# Altium PCB Solar Tracker.PcbDoc
Units mm, origin at the board's own origin, x right, y up, seen from the top; angles counter-clockwise.
Board outline 64 x 61 mm, 2 copper layers (Top Layer, Bottom Layer), stack 1.621 mm thick; 56 components, 24 nets, 190 pads, 105 vias.
Unrouted connection lines stored in the file: 1.
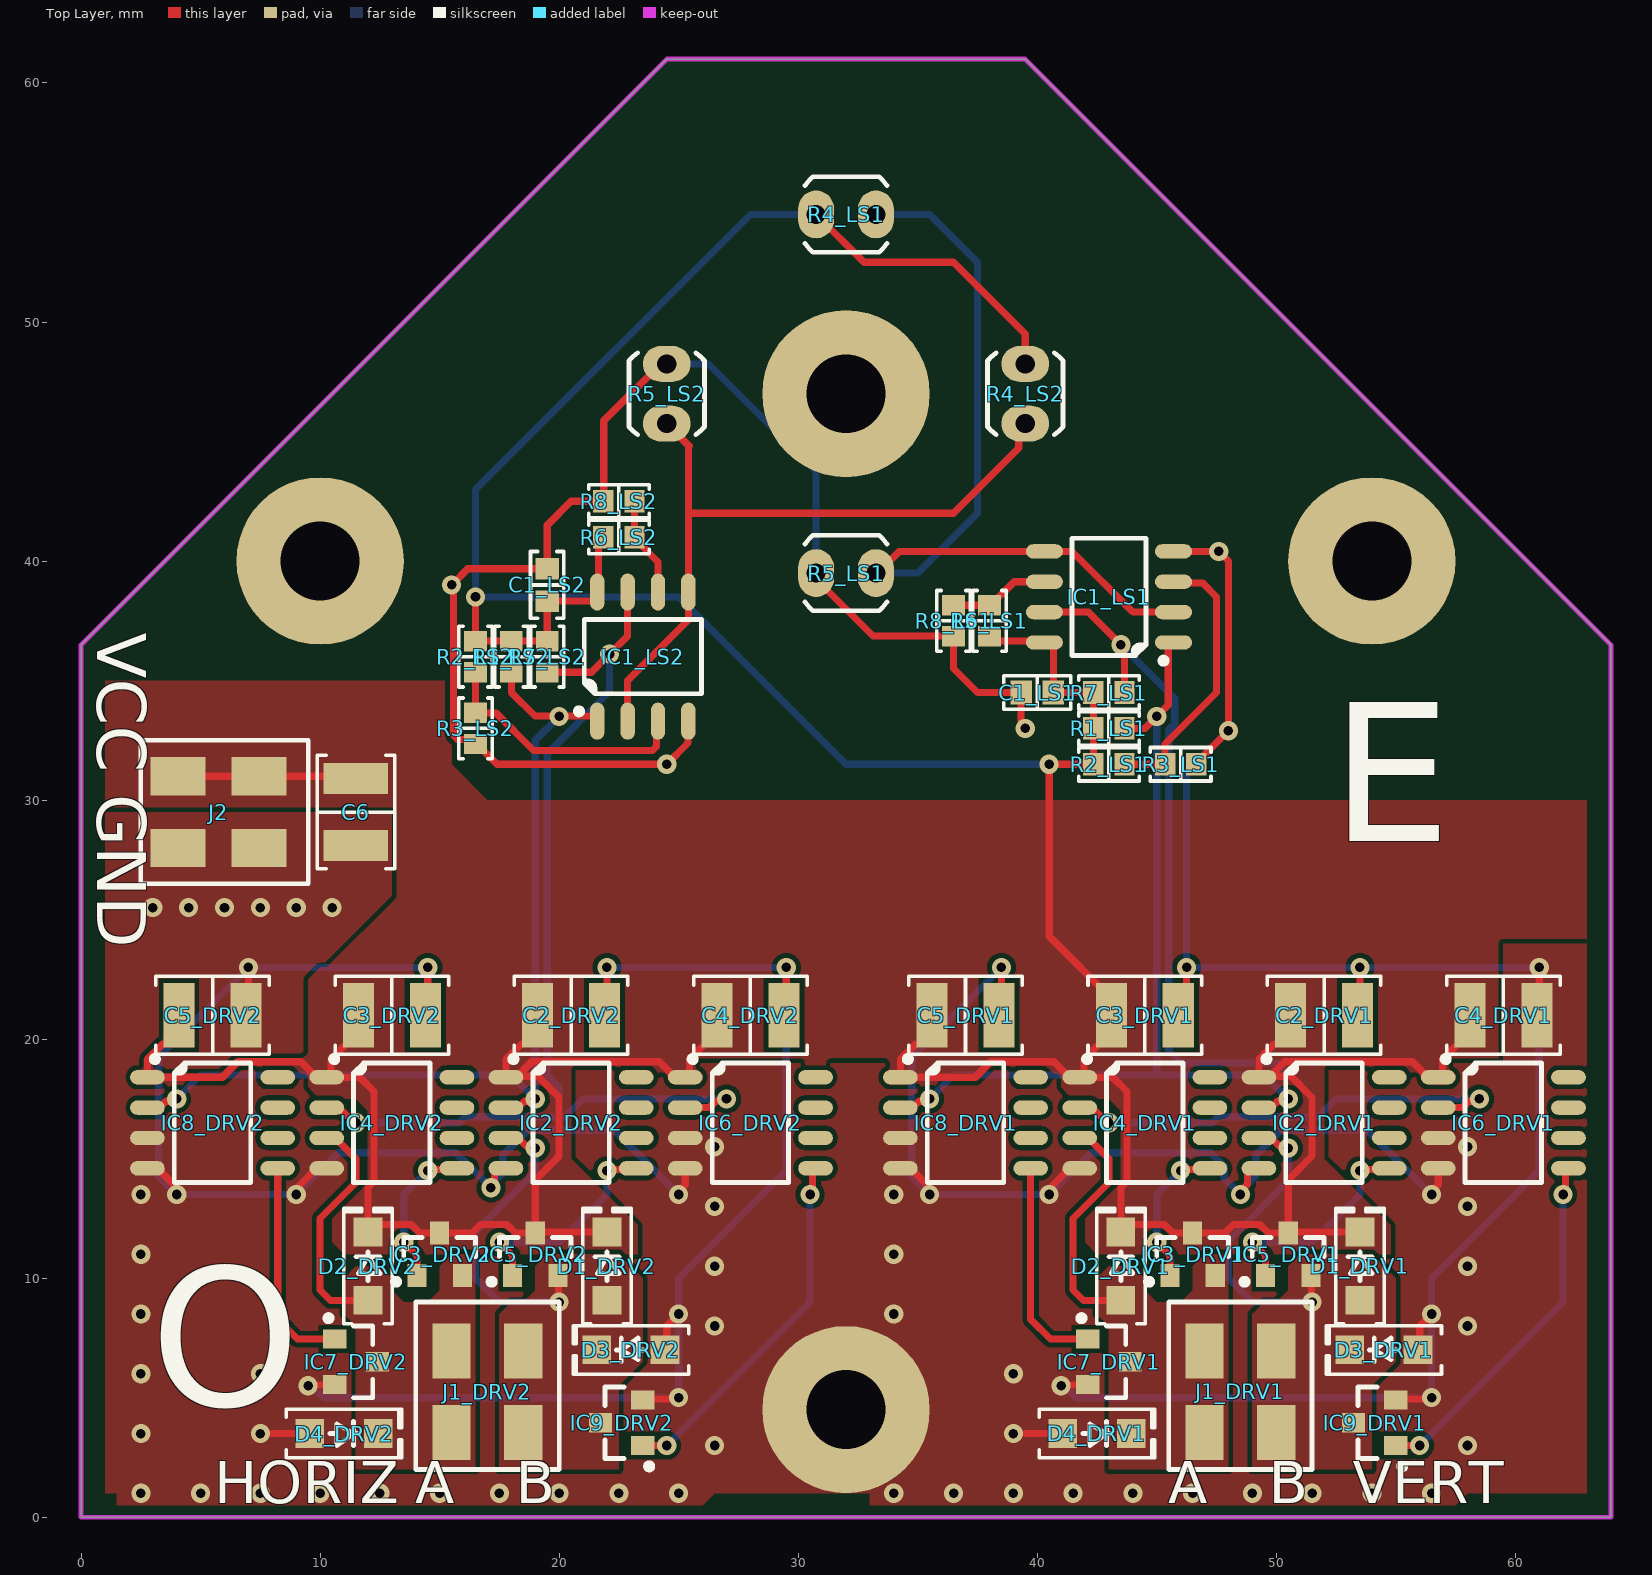
[diagram p0: Top Layer view]
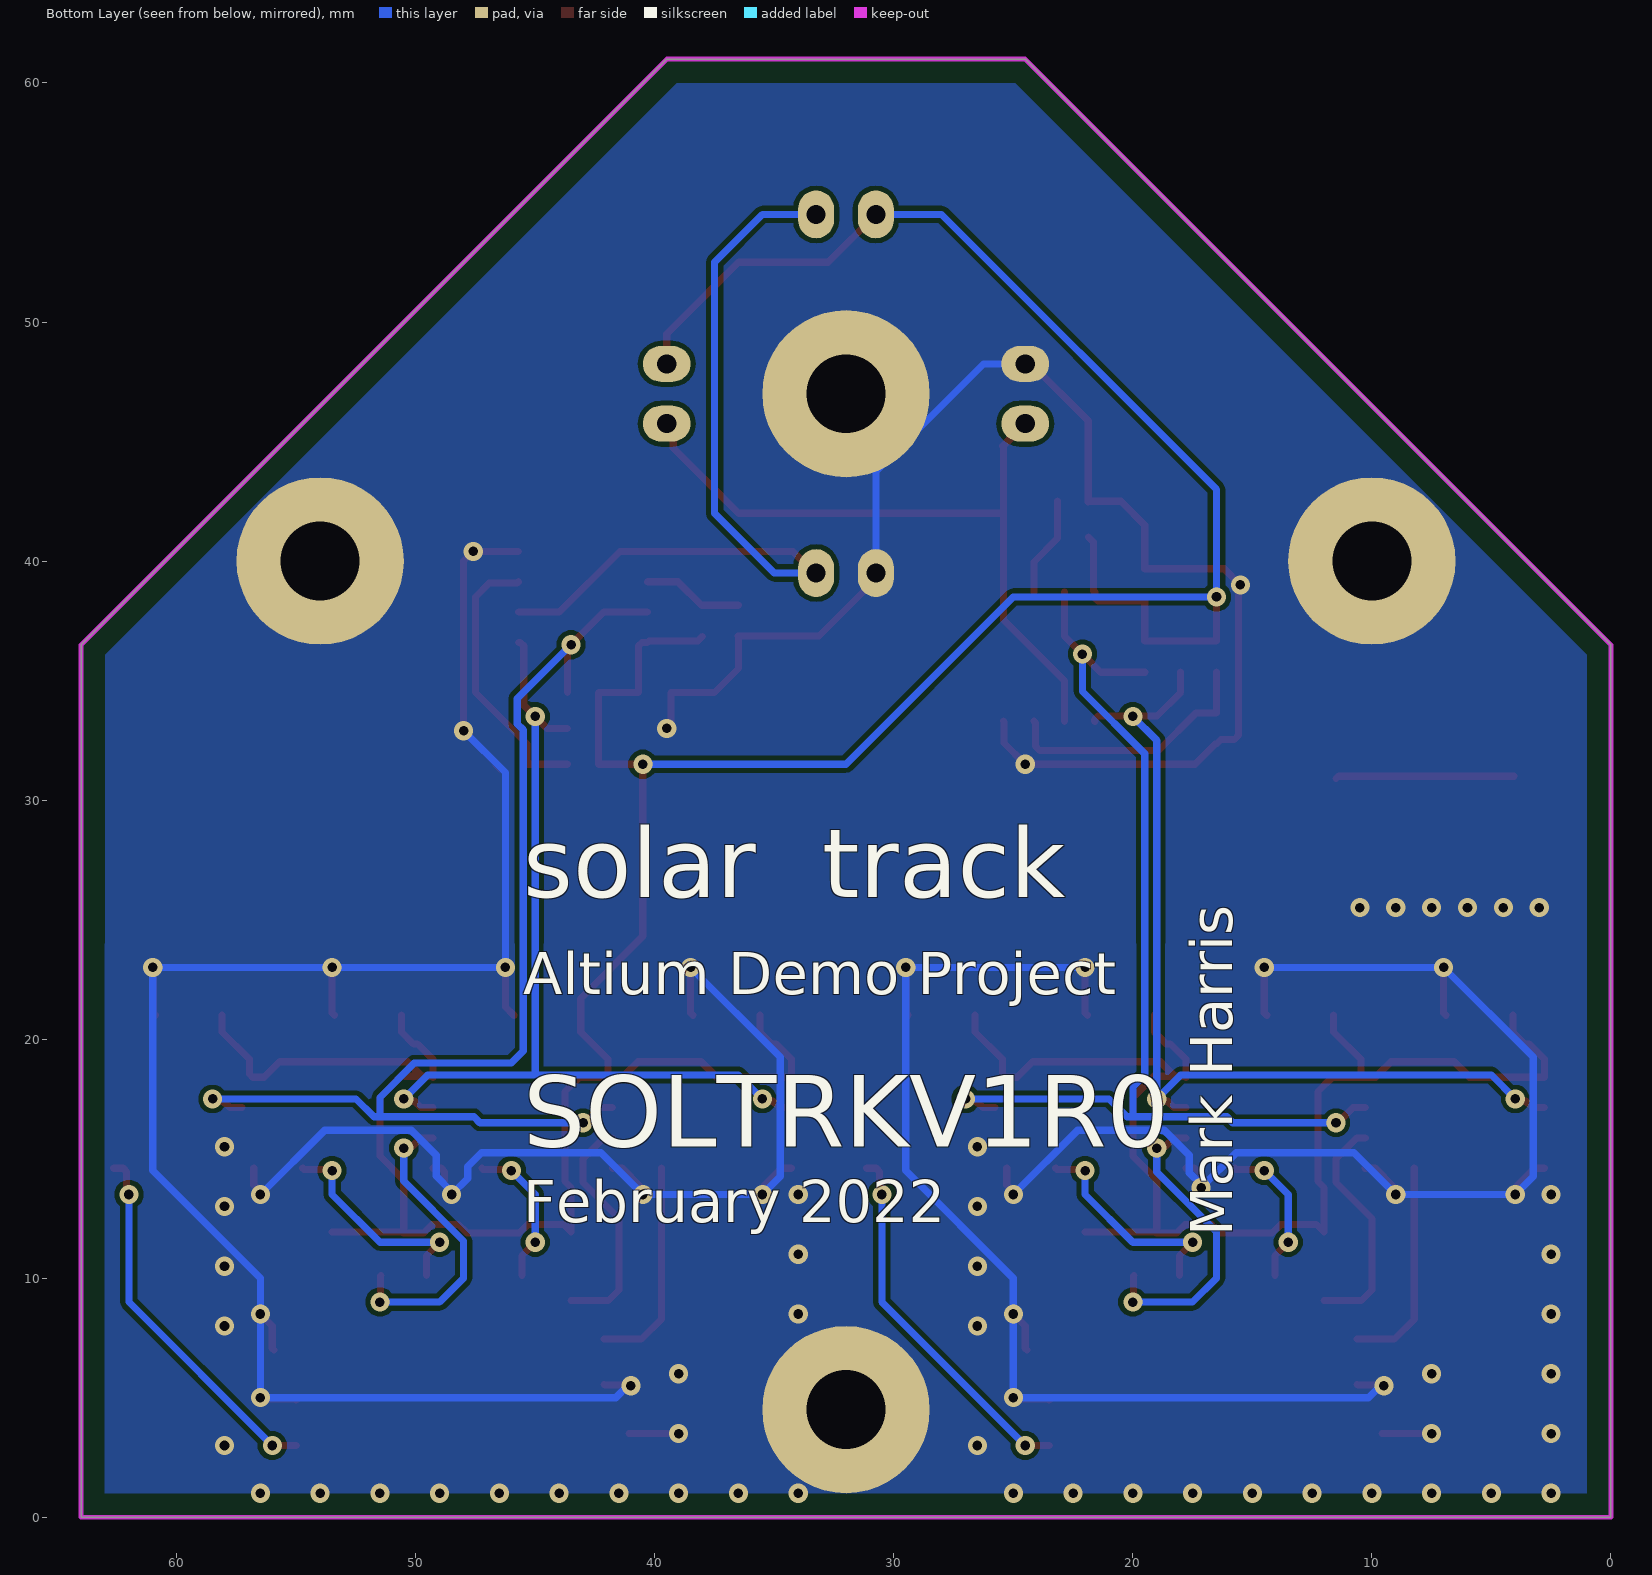
[diagram p1: Bottom Layer view, seen from below]
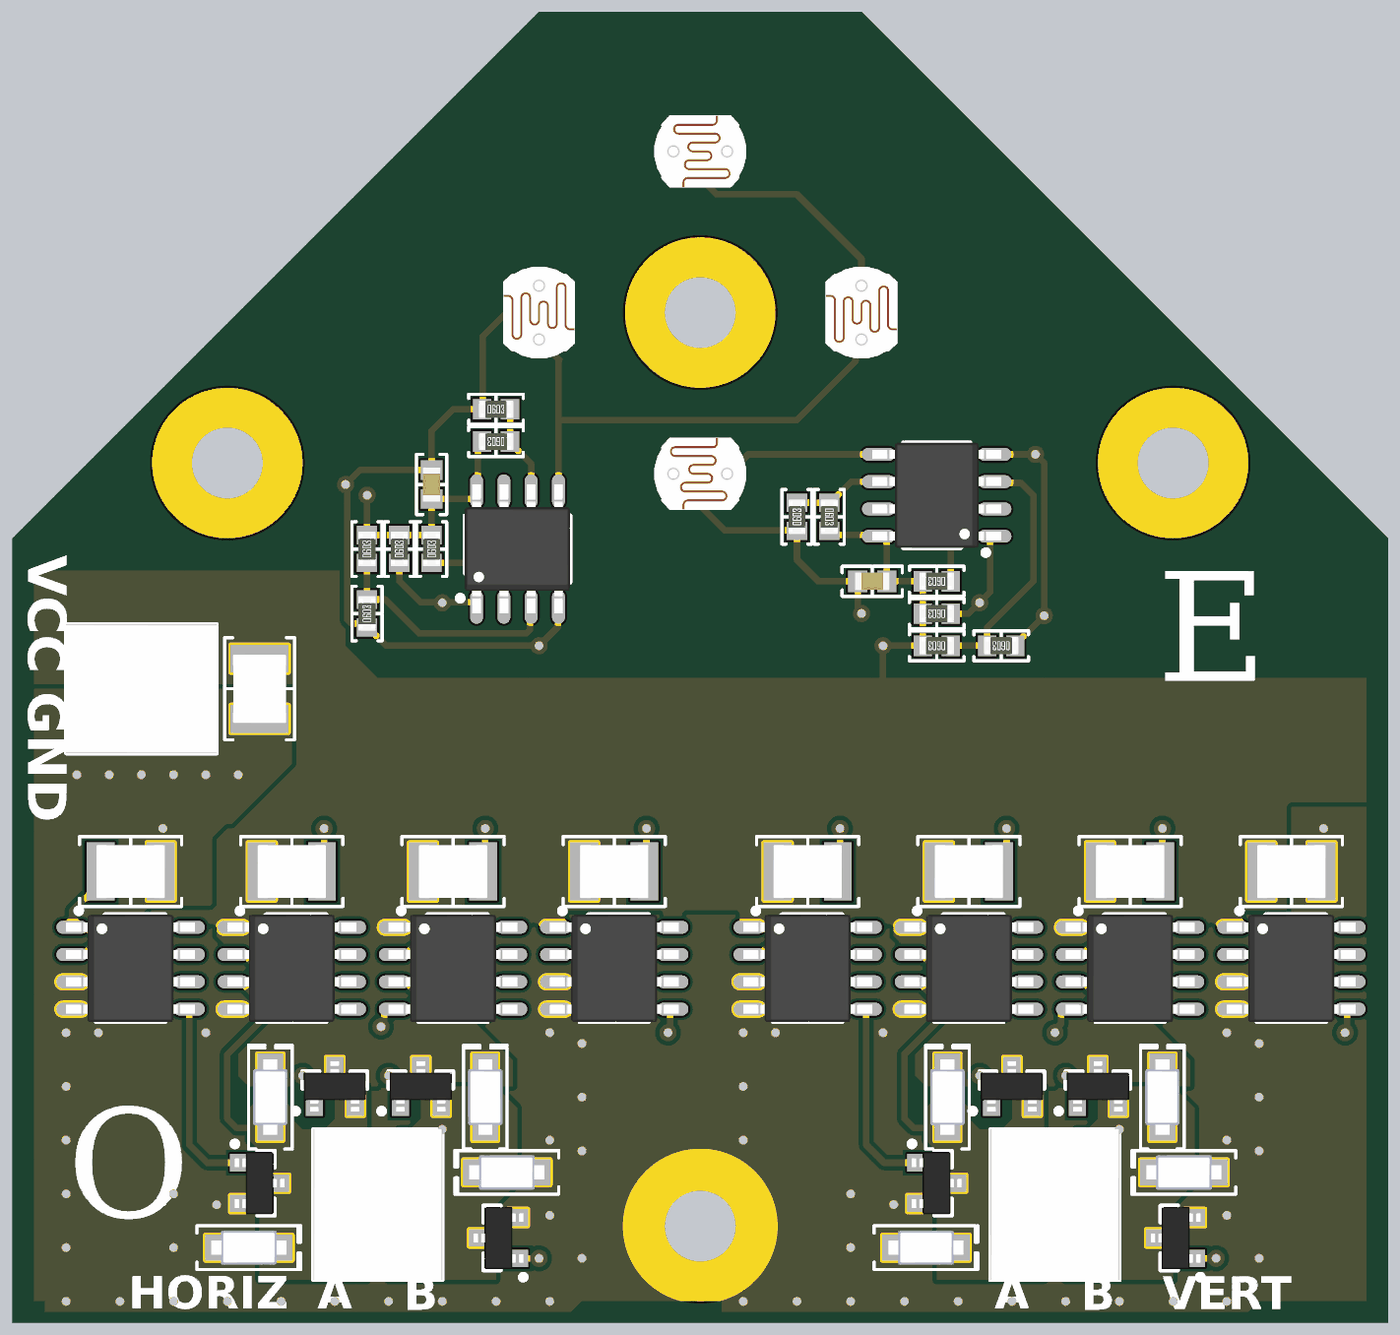
[diagram p2: 3D render of the assembled board from above, using the file's embedded part models]

## Layer stack, top to bottom
Top Solder: solder mask 0.0102, Solder Resist, Dk 3.5
Top Layer: signal copper 0.0356
Dielectric 1: dielectric 1.55, FR-4, Dk 4.8
Bottom Layer: signal copper 0.0356
Bottom Solder: solder mask 0.0102, Solder Resist, Dk 3.5

## Board outline
0,0 64,0 64,36.5 39.5,61 24.5,61 0,36.5

## Design rules (kind name [scope] priority, off if disabled: settings)
BoardOutlineClearance [All] p1: gap=1 ignorepadtopadclearanceinfootprint=FALSE
Clearance [All] p1: gap=0.2 ignorepadtopadclearanceinfootprint=FALSE
ComponentClearance ComponentClearance_1 [All vs InComponentClass('LS1') OR InComponentClass('LS2')] p1: gap=0.075 collisioncheckmode=3 verticalgap=0.2 showdistances=FALSE
ComponentClearance [All] p2: gap=0.254 collisioncheckmode=3 verticalgap=0.254 showdistances=FALSE
MinimumSolderMaskSliver [All] p1: minsoldermaskwidth=-10
PolygonConnect [All] p1: connectstyle=Direct reliefconductorwidth=0.254 reliefentries=4 polygonreliefangle="90 Angle" airgapwidth=0.254
RoomDefinition "Solar Tracker" [InComponentClass('Solar Tracker')] p1: confinementstyle=ConfineIn formatcopy=TRUE lockcomponents=FALSE outline 13.5,26 13.5,33 2,33 2,26
RoomDefinition DRV2 [InComponentClass('DRV2')] p2: confinementstyle=ConfineIn formatcopy=TRUE lockcomponents=FALSE outline 1,0 32.5,0 32.5,26 1,26
RoomDefinition LS2 [InComponentClass('LS2')] p3: confinementstyle=ConfineIn formatcopy=TRUE lockcomponents=FALSE outline 14.5,29 14.5,49.5 42,49.5 42,44 26.5,44 26.5,29
RoomDefinition LS1 [InComponentClass('LS1')] p4: confinementstyle=ConfineIn formatcopy=TRUE lockcomponents=FALSE outline 49.5,29.5 29,29.5 29,57 34.5,57 34.5,41.5 49.5,41.5
RoomDefinition DRV1 [InComponentClass('DRV1')] p5: confinementstyle=ConfineIn formatcopy=TRUE lockcomponents=FALSE outline 32.5,0 64,0 64,26 32.5,26
RoutingVias [All] p1: holewidth=0.4 width=0.8 viastyle="Through Hole" minholewidth=0.3 minwidth=0.6 maxholewidth=4 maxwidth=6
SilkToSilkClearance [All] p1: silktosilkclearance=-10
SilkToSolderMaskClearance [IsPad] p1: minsilkscreentomaskgap=-10 clearancetoexposedcopper=TRUE
SolderMaskExpansion "Via Tent" [IsVia] p1: expansion=0.102 istentingtop=TRUE
SolderMaskExpansion [All] p2: expansion=0.102 istentingtop=FALSE
Width [All] p1: maxlimit=2 minlimit=0.2 preferedwidth=0.3
26 further rules are at their usual default settings.

## Classes and differential pairs
component class "Solar Tracker": C6 J2
channel class "Motor Driver": DRV1 DRV2
channel class "Light Sensor": LS1 LS2
component class LS2: C1_LS2 IC1_LS2 R1_LS2 R2_LS2 R3_LS2 R4_LS2 R5_LS2 R6_LS2 R7_LS2 R8_LS2
component class LS1: C1_LS1 IC1_LS1 R1_LS1 R2_LS1 R3_LS1 R4_LS1 R5_LS1 R6_LS1 R7_LS1 R8_LS1
component class DRV2: C2_DRV2 C3_DRV2 C4_DRV2 C5_DRV2 D1_DRV2 D2_DRV2 D3_DRV2 D4_DRV2 IC2_DRV2 IC3_DRV2 IC4_DRV2 IC5_DRV2 IC6_DRV2 IC7_DRV2 IC8_DRV2 IC9_DRV2 J1_DRV2
component class DRV1: C2_DRV1 C3_DRV1 C4_DRV1 C5_DRV1 D1_DRV1 D2_DRV1 D3_DRV1 D4_DRV1 IC2_DRV1 IC3_DRV1 IC4_DRV1 IC5_DRV1 IC6_DRV1 IC7_DRV1 IC8_DRV1 IC9_DRV1 J1_DRV1

## Components (designator, comment, footprint, x,y, rotation, side; value= is the part's Value field where it differs from the comment)
C1_LS1 "0.1 µF" "CAP 0603_1608" 40,34.5 r0 top (schematic designator C1)
C1_LS2 "0.1 µF" "CAP 0603_1608" 19.5,39 r270 top (schematic designator C1)
C2_DRV1 "10 µF" "CAP 1210_3225 - 1MM" 52,21 r180 top (schematic designator C2)
C2_DRV2 "10 µF" "CAP 1210_3225 - 1MM" 20.5,21 r180 top (schematic designator C2)
C3_DRV1 "10 µF" "CAP 1210_3225 - 1MM" 44.5,21 r180 top (schematic designator C3)
C3_DRV2 "10 µF" "CAP 1210_3225 - 1MM" 13,21 r180 top (schematic designator C3)
C4_DRV1 "10 µF" "CAP 1210_3225 - 1MM" 59.5,21 r180 top (schematic designator C4)
C4_DRV2 "10 µF" "CAP 1210_3225 - 1MM" 28,21 r180 top (schematic designator C4)
C5_DRV1 "10 µF" "CAP 1210_3225 - 1MM" 37,21 r180 top (schematic designator C5)
C5_DRV2 "10 µF" "CAP 1210_3225 - 1MM" 5.5,21 r180 top (schematic designator C5)
C6 "10 µF" "CAP 1210_3225 - 1MM" 11.5,29.5 r90 top
D1_DRV1 "DSS15UTR" SOD123F 53.5,10.5 r90 top (schematic designator D1)
D1_DRV2 "DSS15UTR" SOD123F 22,10.5 r90 top (schematic designator D1)
D2_DRV1 "DSS15UTR" SOD123F 43.5,10.5 r90 top (schematic designator D2)
D2_DRV2 "DSS15UTR" SOD123F 12,10.5 r90 top (schematic designator D2)
D3_DRV1 "DSS15UTR" SOD123F 54.5,7 r180 top (schematic designator D3)
D3_DRV2 "DSS15UTR" SOD123F 23,7 r180 top (schematic designator D3)
D4_DRV1 "DSS15UTR" SOD123F 42.5,3.5 r0 top (schematic designator D4)
D4_DRV2 "DSS15UTR" SOD123F 11,3.5 r0 top (schematic designator D4)
IC1_LS1 "MCP6547T-I/SN" "MICROCHIP SOIC-8 SN" 43,38.5 r180 top (schematic designator IC1)
IC1_LS2 "MCP6547T-I/SN" "MICROCHIP SOIC-8 SN" 23.5,36 r90 top (schematic designator IC1)
IC2_DRV1 "MIC5015YM" "MICROCHIP MICREL SOP-8 M" 52,16.5 r0 top (schematic designator IC2)
IC2_DRV2 "MIC5015YM" "MICROCHIP MICREL SOP-8 M" 20.5,16.5 r0 top (schematic designator IC2)
IC3_DRV1 "IRLML6246TRPBF" "INFINEON SOT-23-3" 46.5,11 r90 top (schematic designator IC3)
IC3_DRV2 "IRLML6246TRPBF" "INFINEON SOT-23-3" 15,11 r90 top (schematic designator IC3)
IC4_DRV1 "MIC5015YM" "MICROCHIP MICREL SOP-8 M" 44.5,16.5 r0 top (schematic designator IC4)
IC4_DRV2 "MIC5015YM" "MICROCHIP MICREL SOP-8 M" 13,16.5 r0 top (schematic designator IC4)
IC5_DRV1 "IRLML6246TRPBF" "INFINEON SOT-23-3" 50.5,11 r90 top (schematic designator IC5)
IC5_DRV2 "IRLML6246TRPBF" "INFINEON SOT-23-3" 19,11 r90 top (schematic designator IC5)
IC6_DRV1 "MIC5015YM" "MICROCHIP MICREL SOP-8 M" 59.5,16.5 r0 top (schematic designator IC6)
IC6_DRV2 "MIC5015YM" "MICROCHIP MICREL SOP-8 M" 28,16.5 r0 top (schematic designator IC6)
IC7_DRV1 "IRLML6246TRPBF" "INFINEON SOT-23-3" 43,6.5 r0 top (schematic designator IC7)
IC7_DRV2 "IRLML6246TRPBF" "INFINEON SOT-23-3" 11.5,6.5 r0 top (schematic designator IC7)
IC8_DRV1 "MIC5015YM" "MICROCHIP MICREL SOP-8 M" 37,16.5 r0 top (schematic designator IC8)
IC8_DRV2 "MIC5015YM" "MICROCHIP MICREL SOP-8 M" 5.5,16.5 r0 top (schematic designator IC8)
IC9_DRV1 "IRLML6246TRPBF" "INFINEON SOT-23-3" 54.115,3.95 r180 top (schematic designator IC9)
IC9_DRV2 "IRLML6246TRPBF" "INFINEON SOT-23-3" 22.615,3.95 r180 top (schematic designator IC9)
J1_DRV1 "009296002202906" "AVX 9296002202806" 48.5,5.5 r0 top (schematic designator J1)
J1_DRV2 "009296002202906" "AVX 9296002202806" 17,5.5 r0 top (schematic designator J1)
J2 "009296002202906" "AVX 9296002202806" 6,29.5 r270 top
R1_LS1 "1 kOhms" "RES 0603_1608" 43,33 r180 top (schematic designator R1)
R1_LS2 "1 kOhms" "RES 0603_1608" 18,36 r90 top (schematic designator R1)
R2_LS1 "88.7 kOhms" "RES 0603_1608" 43,31.5 r180 top (schematic designator R2)
R2_LS2 "88.7 kOhms" "RES 0603_1608" 16.5,36 r90 top (schematic designator R2)
R3_LS1 "100 kOhms" "RES 0603_1608" 46,31.5 r180 top (schematic designator R3)
R3_LS2 "100 kOhms" "RES 0603_1608" 16.5,33 r90 top (schematic designator R3)
R4_LS1 "NSL-19M51" "ADVANCED PHOTONIX NSL-19M51" 32,54.5 r180 top (schematic designator R4)
R4_LS2 "NSL-19M51" "ADVANCED PHOTONIX NSL-19M51" 39.5,47 r90 top (schematic designator R4)
R5_LS1 "NSL-19M51" "ADVANCED PHOTONIX NSL-19M51" 32,39.5 r0 top (schematic designator R5)
R5_LS2 "NSL-19M51" "ADVANCED PHOTONIX NSL-19M51" 24.5,47 r270 top (schematic designator R5)
R6_LS1 "113 kOhms" "RES 0603_1608" 38,37.5 r270 top (schematic designator R6)
R6_LS2 "113 kOhms" "RES 0603_1608" 22.5,41 r180 top (schematic designator R6)
R7_LS1 "1 kOhms" "RES 0603_1608" 43,34.5 r180 top (schematic designator R7)
R7_LS2 "1 kOhms" "RES 0603_1608" 19.5,36 r90 top (schematic designator R7)
R8_LS1 "100 kOhms" "RES 0603_1608" 36.5,37.5 r90 top (schematic designator R8)
R8_LS2 "100 kOhms" "RES 0603_1608" 22.5,42.5 r0 top (schematic designator R8)

## Footprints (in the part's own frame and the unit in brackets; to place one, negate y for a bottom-side part, rotate by r counter-clockwise, add the part's x,y. Pads: shape width x height; smd on the part's side, far side on the other; paste and mask are expansions set on the pad)
"ADVANCED PHOTONIX NSL-19M51" [mm] "4mm Photoresistor"
  oval 1.5x2 hole 0.8: 1(-1.25,0) 2(1.25,0)
  silkscreen extent -1.72,-1.58 1.72,1.58, body extent -2.15,-1.65 2.15,1.65, height 1.8
"AVX 9296002202806" [mm] "POKE-HOME: LOW PROFILE HORIZONTAL"
  rect 1.6x2.3 smd: 1(-1.5,-1.95) 1(-1.5,1.45) 2(1.5,-1.95) 2(1.5,1.45)
  silkscreen extent -3,-3.5 3,3.5, body extent -3,-3.5 3,3.5, height 2.55
"CAP 0603_1608" [mm] "Chip Capacitor, 2-Leads, Body 1.60x0.80mm, IPC Medium Density"
  rect 0.9x1 smd: 1(-0.675,0) 2(0.675,0)
  silkscreen extent -1.4,-0.7 1.4,0.7, body extent -0.8,-0.41 0.8,0.41, height 0.82
"CAP 1210_3225 - 1MM" [mm] "Chip Capacitor, 2-Leads, Body 3.20x2.50mm, IPC Medium Density"
  rect 1.3x2.7 smd: 1(-1.4,0) 2(1.4,0)
  silkscreen extent -2.37,-1.63 2.37,1.63, body extent -1.6,-1.25 1.6,1.25, height 1
"INFINEON SOT-23-3" [mm] "SOT23, 3-Leads, Body 2.90x2.40mm, Pitch 0.95mm, IPC Medium Density"
  rect 0.972x0.802 smd: 1(-0.885,0.95) 2(-0.885,-0.95) 3(0.885,0)
  silkscreen extent -1.27,-1.5 0.7,1.95, body extent -1.16,-1.45 1.16,1.45, height 1
"MICROCHIP MICREL SOP-8 M" [mm] "SOIC, 8-Leads, Body 4.90x3.90mm, Pitch 1.27mm, IPC Medium Density"
  oval 1.45x0.6 smd: 1(-2.725,1.905) 2(-2.725,0.635) 3(-2.725,-0.635) 4(-2.725,-1.905) 5(2.725,-1.905) 6(2.725,-0.635) 7(2.725,0.635) 8(2.725,1.905)
  silkscreen extent -2.54,-2.5 1.6,2.79, body extent -3,-2.5 3,2.5, height 1.63
"MICROCHIP SOIC-8 SN" [mm] "SOIC, 8-Leads, Body 4.90x3.90mm, Pitch 1.27mm, IPC Medium Density"
  oval 1.55x0.6 smd: 1(-2.7,1.905) 2(-2.7,0.635) 3(-2.7,-0.635) 4(-2.7,-1.905) 5(2.7,-1.905) 6(2.7,-0.635) 7(2.7,0.635) 8(2.7,1.905)
  silkscreen extent -2.41,-2.45 1.55,2.79, body extent -3,-2.45 3,2.45, height 1.75
"RES 0603_1608" [mm] "Chip Resistor, 2-Leads, Body 1.60x0.80mm, IPC Medium Density"
  rect 0.85x0.95 smd: 1(-0.65,0) 2(0.65,0)
  silkscreen extent -1.27,-0.7 1.27,0.7, body extent -0.8,-0.4 0.8,0.4, height 0.45
SOD123F [mm] "SODFL, 2-Leads, Body 1.60x3.50mm, IPC Medium Density"
  rect 1.2x1.2 smd: 1(-1.43,0) 2(1.43,0)
  silkscreen extent -2.41,-1.02 2.41,1.02, body extent -1.75,-0.8 1.75,0.8, height 1.1

## Part data
C1_LS1 C1_LS2: library part C0603C104K5RAC7411, "CAP CER 0.1UF 50V X7R 0603", Device Package="0603 (1608 Metric)", manufacturer=KEMET, Operating Temperature="-55°C ~ 125°C", Supplier Part Number 1=399-7374-2-ND, Temperature Coefficient=X7R, Tolerance=±10%, Voltage - Rated=50V, Applications="Bypass, Decoupling", Capacitance="0.1 µF", componentlink1description=Datasheet, componentlink1url=https://api.kemet.com/component-edge/download/datasheet/C0603C104K5RAC7411.pdf, componentlink2description="DigiKey Link", componentlink2url=https://www.digikey.com/en/products/detail/kemet/C0603C104K5RAC7411/3317013, lastupdated="28/02/2022 16:36:23", Lifecycle Status=Active, Minimum Order=15000, Mounting Type="Surface Mount, MLCC", Package / Case="0603 (1608 Metric)", packaging=TapeAndReel, Part Number=C0603C104K5RAC7411, Part Status=Active, partid=2233, price=0.01, series="SMD Comm X7R", Size / Dimension="0.063\" L x 0.031\" W (1.60mm x 0.80mm)", Supplier 1=DigiKey, Thickness (Max)="0.035\" (0.90mm)"
C2_DRV1 C2_DRV2 C3_DRV1 C3_DRV2 C4_DRV1 C4_DRV2 C5_DRV1 C5_DRV2 C6: library part CL32A106MOJNNNE, "CAP CER 10UF 16V X5R 1210", Device Package="1210 (3225 Metric)", manufacturer="Samsung Electro-Mechanics", Operating Temperature="-55°C ~ 85°C", Supplier Part Number 1=1276-2864-1-ND, Temperature Coefficient=X5R, Tolerance=±20%, Voltage - Rated=16V, Applications="General Purpose", Capacitance="10 µF", componentlink1description=Datasheet, componentlink1url=http://www.samsungsem.com/kr/support/product-search/mlcc/CL32A106MOJNNNE.jsp, componentlink2description="DigiKey Link", componentlink2url=https://www.digikey.com/en/products/detail/samsung-electro-mechanics/CL32A106MOJNNNE/3888522, lastupdated="03/03/2022 14:36:33", Lifecycle Status=Active, Minimum Order=1, Mounting Type="Surface Mount, MLCC", Package / Case="1210 (3225 Metric)", packaging=TapeAndReel, Part Number=CL32A106MOJNNNE, Part Status=Active, partid=23713, price=0.07, series=CL, Size / Dimension="0.126\" L x 0.098\" W (3.20mm x 2.50mm)", Supplier 1=DigiKey, Thickness (Max)="0.106\" (2.70mm)"
D1_DRV1 D1_DRV2 D2_DRV1 D2_DRV2 D3_DRV1 D3_DRV2 D4_DRV1 D4_DRV2: "SCHOTTKY 50V SOD-123FL", Capacitance @ Vr, F="110pF @ 4V, 1MHz", Current - Average Rectified (Io)=1A, Current - Reverse Leakage @ Vr="100 µA @ 50 V", manufacturer="SMC Diode Solutions", Operating Temperature - Junction="-55°C ~ 150°C", Package / Case=SOD-123F, Supplier Device Package=SOD-123FL, Supplier Part Number 1=1655-1928-1-ND, Voltage - DC Reverse (Vr) (Max)="50 V", Voltage - Forward (Vf) (Max) @ If="670 mV @ 1 A", componentlink1description=Datasheet, componentlink1url=http://www.smc-diodes.com/propdf/DSS12U%20THRU%20DSS125U%20N1873%20REV.A.pdf, componentlink2description="DigiKey Link", componentlink2url=https://www.digikey.com/en/products/detail/smc-diode-solutions/DSS15UTR/8341860, Diode Type=Schottky, lastupdated="03/03/2022 14:49:54", Lifecycle Status=Active, Minimum Order=1, Mounting Type="Surface Mount", packaging=TapeAndReel, Part Number=DSS15UTR, Part Status=Active, partid=2511, price=0.03, series=-, Speed="Fast Recovery =< 500ns, > 200mA (Io)", Supplier 1=DigiKey
IC1_LS1 IC1_LS2: "IC COMP OPENDRN 1.6V DUAL 8-SOIC", Current - Input Bias (Max)="1pA @ 5.5V", Current - Output (Typ)=30mA, Current - Quiescent (Max)=1µA, manufacturer="Microchip Technology", Operating Temperature="-40°C ~ 85°C", Package / Case="8-SOIC (0.154\", 3.90mm Width)", Supplier Device Package=8-SOIC, Supplier Part Number 1=MCP6547T-I/SNCT-ND, Voltage - Input Offset (Max)="7mV @ 5.5V", Voltage - Supply, Single/Dual (±)="1.6V ~ 5.5V", CMRR, PSRR (Typ)="70dB CMRR, 80dB PSRR", componentlink1description=Datasheet, componentlink1url=http://www.microchip.com/mymicrochip/filehandler.aspx?ddocname=en020853, componentlink2description="DigiKey Link", componentlink2url=https://www.digikey.com/en/products/detail/microchip-technology/MCP6547T-I-SN/458458, Hysteresis=6.5mV, lastupdated="02/03/2022 20:22:27", Lifecycle Status=Active, Minimum Order=1, Mounting Type="Surface Mount", Number of Elements=2, Output Type="CMOS, Open-Drain, Rail-to-Rail, TTL", packaging=TapeAndReel, Part Number=MCP6547T-I/SN, Part Status=Active, price=0.53, Propagation Delay (Max)=8µs, series=-, Supplier 1=DigiKey, Type="General Purpose"
IC2_DRV1 IC2_DRV2 IC4_DRV1 IC4_DRV2 IC6_DRV1 IC6_DRV2 IC8_DRV1 IC8_DRV2: "IC GATE DRVR HI/LOW SIDE 8SOIC", Logic Voltage - VIL, VIH="0.8V, 2V", manufacturer="Microchip Technology", Operating Temperature="-40°C ~ 150°C (TJ)", Package / Case="8-SOIC (0.154\", 3.90mm Width)", Supplier Device Package=8-SOIC, Supplier Part Number 1=576-1235-ND, Voltage - Supply="2.75V ~ 30V", Channel Type=Single, componentlink1description=Datasheet, componentlink1url=http://ww1.microchip.com/downloads/en/DeviceDoc/mic5014.pdf, componentlink2description="DigiKey Link", componentlink2url=https://www.digikey.com/en/products/detail/microchip-technology/MIC5015YM/771704, Driven Configuration="High-Side or Low-Side", Gate Type="N-Channel MOSFET", Input Type=Inverting, lastupdated="03/03/2022 15:47:18", Lifecycle Status=Active, Minimum Order=1, Mounting Type="Surface Mount", Number of Drivers=1, packaging=Tube, Part Number=MIC5015YM, Part Status=Active, partid=15, price=2.00, series=-, Supplier 1=DigiKey
IC3_DRV1 IC3_DRV2 IC5_DRV1 IC5_DRV2 IC7_DRV1 IC7_DRV2 IC9_DRV1 IC9_DRV2: "MOSFET N-CH 20V 4.1A SOT-23", Current - Continuous Drain (Id) @ 25°C="4.1A (Ta)", Drain to Source Voltage (Vdss)=20V, Drive Voltage (Max Rds On,  Min Rds On)="2.5V, 4.5V", Input Capacitance (Ciss) (Max) @ Vds="290pF @ 16V", manufacturer="Infineon Technologies", Operating Temperature="-55°C ~ 150°C (TJ)", Package / Case="TO-236-3, SC-59, SOT-23-3", Power Dissipation (Max)="1.3W (Ta)", Supplier Device Package=Micro3™/SOT-23, Supplier Part Number 1=IRLML6246TRPBFCT-ND, componentlink1description=Datasheet, componentlink1url=https://www.infineon.com/dgdl/irlml6246pbf.pdf?fileId=5546d462533600a40153566878f22621, componentlink2description="DigiKey Link", componentlink2url=http://digikey.com/product-detail/en/infineon-technologies/IRLML6246TRPBF/IRLML6246TRPBFCT-ND/2393880, FET Type=N-Channel, Gate Charge (Qg) (Max) @ Vgs="3.5nC @ 4.5V", lastupdated="02/09/2020 01:25:05", Lifecycle Status=Active, Minimum Order=1, Mounting Type="Surface Mount", packaging=TapeAndReel, Part Number=IRLML6246TRPBF, Part Status=Active, price=0.09, Rds On (Max) @ Id, Vgs="46mOhm @ 4.1A, 4.5V", series=HEXFET®, Supplier 1=DigiKey, Technology="MOSFET (Metal Oxide)", Vgs (Max)=±12V, Vgs(th) (Max) @ Id="1.1V @ 5µA"
J1_DRV1 J1_DRV2 J2: "CONN WIRE POKE-IN 2POS SMD RA", Color=White, manufacturer="AVX Corporation", Supplier Part Number 1=478-9533-1-ND, Board-Side Pitch="0.118\" (3.00mm)", Cable Pitch="0.118\" (3.00mm)", Cable Termination=Poke-In, componentlink1description=Datasheet, componentlink1url=http://datasheets.avx.com/PHLPHorizontal_00-9296.pdf, componentlink2description="DigiKey Link", componentlink2url=http://digikey.com/product-detail/en/avx-corporation/009296002202906/478-9533-1-ND/5161727, Connector Type="Individual Wires", Contact Finish=Tin, Features="Closed End", lastupdated="01/05/2020 07:29:21", Lifecycle Status=Active, Minimum Order=1, Mounting Type="Surface Mount, Right Angle", Number of Positions=2, Number of Rows=1, packaging=TapeAndReel, Part Number=009296002202906, Part Status=Active, price=0.23, series=9296, Supplier 1=DigiKey, Wire Gauge="20-26 AWG"
R1_LS1 R1_LS2 R7_LS1 R7_LS2: library part ERJ-PA3J102V, "RES SMD 1K OHM 5% 1/4W 0603", Device Package="0603 (1608 Metric)", manufacturer="Panasonic Electronic Components", Operating Temperature="-55°C ~ 155°C", Power (Watts)="0.25W, 1/4W", Ratings=AEC-Q200, Supplier Device Package=0603, Supplier Part Number 1=P1KBZCT-ND, Temperature Coefficient=±200ppm/°C, Tolerance=±5%, componentlink1description=Datasheet, componentlink1url=https://industrial.panasonic.com/cdbs/www-data/pdf/RDO0000/AOA0000C331.pdf, componentlink2description="DigiKey Link", componentlink2url=https://www.digikey.com/en/products/detail/panasonic-electronic-components/ERJ-PA3J102V/5035970, Composition="Thick Film", Features="Automotive AEC-Q200, Pulse Withstanding", Height - Seated (Max)="0.022\" (0.55mm)", lastupdated="28/02/2022 16:15:56", Lifecycle Status=Active, Minimum Order=1, Number of Terminations=2, Package / Case="0603 (1608 Metric)", packaging=TapeAndReel, Part Number=ERJ-PA3J102V, Part Status=Active, partid=17507, price=0.01, Resistance="1 kOhms", series=ERJ-PA3, Size / Dimension="0.063\" L x 0.031\" W (1.60mm x 0.80mm)", Supplier 1=DigiKey
R2_LS1 R2_LS2: library part RC0603FR-0788K7L, "RES 88.7K OHM 1% 1/10W 0603", Device Package="0603 (1608 Metric)", manufacturer=Yageo, Operating Temperature="-55°C ~ 155°C", Power (Watts)="0.1W, 1/10W", Supplier Device Package=0603, Supplier Part Number 1=311-88.7KHRCT-ND, Temperature Coefficient=±100ppm/°C, Tolerance=±1%, componentlink1description=Datasheet, componentlink1url=https://www.yageo.com/upload/media/product/productsearch/datasheet/rchip/PYu-RC_Group_51_RoHS_L_10.pdf, componentlink2description="DigiKey Link", componentlink2url=https://www.digikey.com/en/products/detail/yageo/RC0603FR-0788K7L/727415, Composition="Thick Film", Features="Moisture Resistant", Height - Seated (Max)="0.022\" (0.55mm)", lastupdated="28/02/2022 16:16:25", Lifecycle Status=Active, Minimum Order=1, Number of Terminations=2, Package / Case="0603 (1608 Metric)", packaging=CutTape, Part Number=RC0603FR-0788K7L, Part Status=Active, partid=7595, price=0.01, Resistance="88.7 kOhms", series=RC_L, Size / Dimension="0.063\" L x 0.031\" W (1.60mm x 0.80mm)", Supplier 1=DigiKey
R3_LS1 R3_LS2 R8_LS1 R8_LS2: library part ERJ-PA3F1003V, "RES SMD 100K OHM 1% 1/4W 0603", Device Package="0603 (1608 Metric)", manufacturer="Panasonic Electronic Components", Operating Temperature="-55°C ~ 155°C", Power (Watts)="0.25W, 1/4W", Ratings=AEC-Q200, Supplier Device Package=0603, Supplier Part Number 1=P100KBYCT-ND, Temperature Coefficient=±100ppm/°C, Tolerance=±1%, componentlink1description=Datasheet, componentlink1url=https://industrial.panasonic.com/cdbs/www-data/pdf/RDO0000/AOA0000C331.pdf, componentlink2description="DigiKey Link", componentlink2url=https://www.digikey.com/en/products/detail/panasonic-electronic-components/ERJ-PA3F1003V/5035850, Composition="Thick Film", Features="Automotive AEC-Q200, Pulse Withstanding", Height - Seated (Max)="0.022\" (0.55mm)", lastupdated="28/02/2022 16:16:03", Lifecycle Status=Active, Minimum Order=1, Number of Terminations=2, Package / Case="0603 (1608 Metric)", packaging=TapeAndReel, Part Number=ERJ-PA3F1003V, Part Status=Active, partid=14879, price=0.02, Resistance="100 kOhms", series=ERJ-PA3, Size / Dimension="0.063\" L x 0.031\" W (1.60mm x 0.80mm)", Supplier 1=DigiKey
R4_LS1 R4_LS2 R5_LS1 R5_LS2: "PHOTOCELL", Cell Resistance (Min) @ Dark="20 MOhms @ 10 s", Cell Resistance @ Illuminance="20 ~ 100kOhms @ 10 lux", Device Package=Radial, manufacturer="Advanced Photonix", Operating Temperature="-60°C ~ 75°C (TA)", Supplier Device Package=TO-18, Supplier Part Number 1=NSL-19M51-ND, Voltage - Max=100Vpk, componentlink1description=Datasheet, componentlink1url=https://lunainc.com/wp-content/uploads/2016/06/NSL-19M51.pdf, componentlink2description="DigiKey Link", componentlink2url=https://www.digikey.com/en/products/detail/advanced-photonix/NSL-19M51/5039794, lastupdated="03/03/2022 12:53:42", Lifecycle Status=Active, Minimum Order=1, Mounting Type="Through Hole", Package / Case=Radial, packaging=Bulk, Part Number=NSL-19M51, Part Status=Active, price=0.61, series=-, Supplier 1=DigiKey, Wavelength=550nm
R6_LS1 R6_LS2: library part RMCF0603FT113K, "RES 113K OHM 1% 1/10W 0603", Device Package="0603 (1608 Metric)", manufacturer="Stackpole Electronics Inc", Operating Temperature="-55°C ~ 155°C", Power (Watts)="0.1W, 1/10W", Ratings=AEC-Q200, Supplier Device Package=0603, Supplier Part Number 1=RMCF0603FT113KCT-ND, Temperature Coefficient=±100ppm/°C, Tolerance=±1%, componentlink1description=Datasheet, componentlink1url=https://www.seielect.com/catalog/sei-rmcf_rmcp.pdf, componentlink2description="DigiKey Link", componentlink2url=https://www.digikey.com/en/products/detail/stackpole-electronics-inc/RMCF0603FT113K/1713567, Composition="Thick Film", Features="Automotive AEC-Q200", Height - Seated (Max)="0.022\" (0.55mm)", lastupdated="28/02/2022 16:16:02", Lifecycle Status=Active, Minimum Order=1, Number of Terminations=2, Package / Case="0603 (1608 Metric)", packaging=CutTape, Part Number=RMCF0603FT113K, Part Status=Active, partid=15681, price=0.01, Resistance="113 kOhms", series=RMCF, Size / Dimension="0.061\" L x 0.031\" W (1.55mm x 0.80mm)", Supplier 1=DigiKey

## Free pads (board coordinates)
  round 7 hole 3.3: M(10,40) M1(54,40) M2(32,4.5) M3(32,47)

## Via types
v1: diameter 0.8, hole 0.4, Top Layer to Bottom Layer, tented both sides, 105 vias

## Nets (pads, with @x,y where several pads share a name; then routed paths per layer and width w, separated by ;. In a path a pad name is that pad's centre, name@x,y a point inside that pad or via, vN(x,y) a via of type N, cw(c..) or ccw(c..) an arc to the next point about the centre after c; other vN are vias at no path point)
3V3: C1_LS1.2 C1_LS2.2 C2_DRV1.2 C2_DRV2.2 C3_DRV1.2 C3_DRV2.2 C4_DRV1.2 C4_DRV2.2 C5_DRV1.2 C5_DRV2.2 C6.2 D1_DRV1.2 D1_DRV2.2 D2_DRV1.2 D2_DRV2.2 IC1_LS1.8 IC1_LS2.8 IC2_DRV1.1 IC2_DRV2.1 IC3_DRV1.3 IC3_DRV2.3 IC4_DRV1.1 IC4_DRV2.1 IC5_DRV1.3 IC5_DRV2.3 IC6_DRV1.1 IC6_DRV2.1 IC8_DRV1.1 IC8_DRV2.1 J2.1 R1_LS1.2 R1_LS2.2 R2_LS1.2 R2_LS2.2 R4_LS1.2 R4_LS2.2 R6_LS1.2 R6_LS2.2 R7_LS1.2 R7_LS2.2 | length 216.3
  Top Layer w0.3: J2.1@4.05,31 7.45,31 11.4,31 C6.2 ; C5_DRV2.2 4.1,20.3 3.6,19.8 3.42,19.8 2.775,19.155 IC8_DRV2.1 5.904,18.405 6.554,19.055 9.2,19.055 9.85,18.405 IC4_DRV2.1 IC4_DRV2.1@10.316,18.405 ; C3_DRV2.2 11.6,20.3 10.455,19.155 10.455,18.544 IC4_DRV2.1@10.316,18.405 ; v1(16.5,38.5) R2_LS2.2 R1_LS2.2 R7_LS2.2 C1_LS2.2 21.456,38.325 21.595,38.464 IC1_LS2.8 21.652,38.757 21.652,40.802 R6_LS2.2 ; C2_DRV2.2 19.1,20.3 18.6,19.8 18.42,19.8 17.775,19.155 IC2_DRV2.1 17.82,18.45 IC2_DRV2.1@18.245,18.45 ; D1_DRV2.2 19.045,11.93 IC5_DRV2.3 ; C4_DRV2.2 26.6,20.3 25.455,19.155 25.455,18.544 25.316,18.405 IC6_DRV2.1 24.85,18.405 24.2,19.055 18.85,19.055 IC2_DRV2.1@18.245,18.45 ; R4_LS1.2 32.75,52.5 36.5,52.5 39.5,49.5 R4_LS2.2 ; C5_DRV1.2 35.6,20.3 35.1,19.8 34.92,19.8 34.275,19.155 IC8_DRV1.1 37.404,18.405 38.054,19.055 40.7,19.055 41.35,18.405 IC4_DRV1.1 IC4_DRV1.1@41.816,18.405 ; R6_LS1.2 38.198,36.652 40.243,36.652 IC1_LS1.8 40.536,36.595 40.675,36.456 C1_LS1.2 R7_LS1.2 R1_LS1.2 R2_LS1.2 v1(40.5,31.5) 40.5,24.3 43.1,21.7 C3_DRV1.2 43.1,20.3 41.955,19.155 41.955,18.544 IC4_DRV1.1@41.816,18.405 ; C2_DRV1.2 50.6,20.3 50.1,19.8 49.92,19.8 49.275,19.155 IC2_DRV1.1 49.32,18.45 IC2_DRV1.1@49.745,18.45 ; D1_DRV1.2 50.545,11.93 IC5_DRV1.3 ; C4_DRV1.2 58.1,20.3 56.955,19.155 56.955,18.544 56.816,18.405 IC6_DRV1.1 56.35,18.405 55.7,19.055 50.35,19.055 IC2_DRV1.1@49.745,18.45 ; IC4_DRV2.1@10.316,18.405 11.656,18.405 12.25,17.811 12.25,14.043 12,13.793 D2_DRV2.2 12.32,12.25 13.811,12.25 14.176,11.885 IC3_DRV2.3 16.348,11.885 16.713,12.25 17.811,12.25 18.176,11.885 IC5_DRV2.3 ; IC2_DRV2.1@18.245,18.45 18.95,18.45 19,18.5 19.061,18.5 20,17.561 20,15.11 19,14.111 IC5_DRV2.3 ; IC4_DRV1.1@41.816,18.405 43.156,18.405 43.75,17.811 43.75,14.043 43.5,13.793 D2_DRV1.2 43.82,12.25 45.311,12.25 45.676,11.885 IC3_DRV1.3 47.848,11.885 48.213,12.25 49.311,12.25 49.676,11.885 IC5_DRV1.3 ; IC2_DRV1.1@49.745,18.45 50.45,18.45 50.5,18.5 50.561,18.5 51.5,17.561 51.5,15.11 50.5,14.111 IC5_DRV1.3
  Bottom Layer w0.3: R4_LS1.2@30.75,54.25 R4_LS1.2 28,54.5 16.5,43 v1(16.5,38.5) 25,38.5 32,31.5 v1(40.5,31.5)
DA_DRV1: D1_DRV1.1 D3_DRV1.2 IC2_DRV1.3 IC5_DRV1.2 IC9_DRV1.3 J1_DRV1.2 | length 12.9
  Top Layer w0.3: IC2_DRV1.3 49.781,15.865 50.11,15.537 50.404,15.537 v1(50.5,15.441) ; IC5_DRV1.2 51.475,10.09 51.475,9.025 v1(51.5,9)
  Bottom Layer w0.3: v1(50.5,15.441) 50.5,14.061 48,11.561 48,10 49,9 v1(51.5,9)
DA_DRV2: D1_DRV2.1 D3_DRV2.2 IC2_DRV2.3 IC5_DRV2.2 IC9_DRV2.3 J1_DRV2.2 | length 12.9
  Top Layer w0.3: IC2_DRV2.3 18.281,15.865 18.61,15.537 18.904,15.537 v1(19,15.441) ; IC5_DRV2.2 19.975,10.09 19.975,9.025 v1(20,9)
  Bottom Layer w0.3: v1(19,15.441) 19,14.439 16.5,11.939 16.5,10 17.5,9 v1(20,9)
DB_DRV1: D2_DRV1.1 D4_DRV1.2 IC3_DRV1.2 IC4_DRV1.3 IC7_DRV1.3 J1_DRV1.1 | length 9.9
  Top Layer w0.3: IC4_DRV1.3 42.135,15.865 43,15 43,14 41.5,12.5 41.5,9.5 41.93,9.07 D2_DRV1.1
DB_DRV2: D2_DRV2.1 D4_DRV2.2 IC3_DRV2.2 IC4_DRV2.3 IC7_DRV2.3 J1_DRV2.1 | length 9.9
  Top Layer w0.3: IC4_DRV2.3 10.635,15.865 11.5,15 11.5,14 10,12.5 10,9.5 10.43,9.07 D2_DRV2.1
FWD_DRV1: IC1_LS1.1 IC2_DRV1.2 IC8_DRV1.2 R1_LS1.1 | length 38.6
  Top Layer w0.3: IC8_DRV1.2 34.781,17.135 35.051,17.404 35.404,17.404 v1(35.5,17.5) ; R1_LS1.1 44.5,33 45.484,33.984 45.484,36.456 45.622,36.595 IC1_LS1.1 ; IC2_DRV1.2 49.781,17.135 50.051,17.404 50.404,17.404 v1(50.5,17.5)
  Bottom Layer w0.3: v1(35.5,17.5) 36.5,18.5 45,18.5 ; v1(45,33.5) 45,18.5 ; v1(50.5,17.5) 49.5,18.5 45,18.5
FWD_DRV2: IC1_LS2.1 IC2_DRV2.2 IC8_DRV2.2 R1_LS2.1 | length 40
  Top Layer w0.3: IC8_DRV2.2 3.281,17.135 3.551,17.404 3.904,17.404 v1(4,17.5) ; IC2_DRV2.2 18.281,17.135 18.551,17.404 18.904,17.404 v1(19,17.5) ; R1_LS2.1 18,34.5 18.984,33.516 21.456,33.516 21.595,33.378 IC1_LS2.1
  Bottom Layer w0.3: v1(4,17.5) 5,18.5 18,18.5 v1(19,17.5) 19,32.5 v1(20,33.5)
GHA_DRV1: IC2_DRV1.5 IC5_DRV1.1 | length 9.2
  Top Layer w0.3: v1(49,11.5) 49.55,10.95 IC5_DRV1.1 ; v1(53.5,14.5) 53.548,14.547 54.677,14.547 IC2_DRV1.5
  Bottom Layer w0.3: v1(49,11.5) 51.5,11.5 53.5,13.5 v1(53.5,14.5)
GHA_DRV2: IC2_DRV2.5 IC5_DRV2.1 | length 9.2
  Top Layer w0.3: v1(17.5,11.5) 18.05,10.95 IC5_DRV2.1 ; v1(22,14.5) 22.047,14.547 23.177,14.547 IC2_DRV2.5
  Bottom Layer w0.3: v1(17.5,11.5) 20,11.5 22,13.5 v1(22,14.5)
GHB_DRV1: IC3_DRV1.1 IC4_DRV1.5 | length 6.3
  Top Layer w0.3: v1(45,11.5) 45.55,10.95 IC3_DRV1.1 ; v1(46,14.5) 46.047,14.547 47.178,14.547 IC4_DRV1.5
  Bottom Layer w0.3: v1(45,11.5) 45,13.5 v1(46,14.5)
GHB_DRV2: IC3_DRV2.1 IC4_DRV2.5 | length 6.3
  Top Layer w0.3: v1(13.5,11.5) 14.05,10.95 IC3_DRV2.1 ; v1(14.5,14.5) 14.547,14.547 15.677,14.547 IC4_DRV2.5
  Bottom Layer w0.3: v1(13.5,11.5) 13.5,13.5 v1(14.5,14.5)
GLA_DRV1: IC6_DRV1.5 IC9_DRV1.1 | length 15.6
  Top Layer w0.3: IC9_DRV1.1 v1(56,3) ; v1(62,13.5) 62.096,13.596 62.096,14.456 62.234,14.595 IC6_DRV1.5@62.639,14.595
  Bottom Layer w0.3: v1(56,3) 62,9 v1(62,13.5)
GLA_DRV2: IC6_DRV2.5 IC9_DRV2.1 | length 15.6
  Top Layer w0.3: IC9_DRV2.1 v1(24.5,3) ; v1(30.5,13.5) 30.596,13.596 30.596,14.456 30.734,14.595 IC6_DRV2.5@31.139,14.595
  Bottom Layer w0.3: v1(24.5,3) 30.5,9 v1(30.5,13.5)
GLB_DRV1: IC7_DRV1.1 IC8_DRV1.5 | length 9.1
  Top Layer w0.3: IC8_DRV1.5 39.725,8.275 40.55,7.45 IC7_DRV1.1
GLB_DRV2: IC7_DRV2.1 IC8_DRV2.5 | length 9.1
  Top Layer w0.3: IC8_DRV2.5 8.225,8.275 9.05,7.45 IC7_DRV2.1
GND: C1_LS1.1 C1_LS2.1 C2_DRV1.1 C2_DRV2.1 C3_DRV1.1 C3_DRV2.1 C4_DRV1.1 C4_DRV2.1 C5_DRV1.1 C5_DRV2.1 C6.1 D3_DRV1.1 D3_DRV2.1 D4_DRV1.1 D4_DRV2.1 IC1_LS1.4 IC1_LS2.4 IC2_DRV1.4 IC2_DRV2.4 IC4_DRV1.4 IC4_DRV2.4 IC6_DRV1.3 IC6_DRV1.4 IC6_DRV2.3 IC6_DRV2.4 IC7_DRV1.2 IC7_DRV2.2 IC8_DRV1.3 IC8_DRV1.4 IC8_DRV2.3 IC8_DRV2.4 IC9_DRV1.2 IC9_DRV2.2 J2.2 pad.M pad.M1 pad.M2 pad.M3 R3_LS1.1 R3_LS2.1 R5_LS1.1 R5_LS2.1 R8_LS1.1 R8_LS2.1 | length 297
  Top Layer w0.3: IC8_DRV2.4 3.2,14.595 3.904,13.891 3.904,13.596 v1(4,13.5) ; C5_DRV2.1 7,21.1 v1(7,23) ; 8,3.5 D4_DRV2.1 ; v1(9,13.5) 9.096,13.596 9.096,13.841 9.85,14.595 IC4_DRV2.4 ; v1(9.5,5.5) 9.525,5.525 10.59,5.525 IC7_DRV2.2 ; C3_DRV2.1 14.5,21.1 v1(14.5,23) ; v1(17.146,13.782) 17.146,13.917 17.293,14.063 17.293,14.456 17.431,14.595 IC2_DRV2.4 ; R8_LS2.1 20.5,42.5 19.5,41.5 C1_LS2.1 16.175,39.675 15.575,39.075 15.575,32.713 15.751,32.537 16.313,32.537 R3_LS2.1 16.55,32.35 17.4,31.5 v1(24.5,31.5) 25.385,32.385 25.385,33.28 IC1_LS2.4 ; R8_LS2.1@21.868,42.482 21.868,45.868 24.25,48.25 R5_LS2.1 ; C2_DRV2.1 22,21.1 v1(22,23) ; IC9_DRV2.2 23.55,4.95 24.95,4.95 v1(25,5) ; D3_DRV2.1 24.5,7.07 24.5,8 v1(25,8.5) ; v1(25,13.5) 25,13.632 25.275,13.907 IC6_DRV2.4 ; C4_DRV2.1 29.5,21.1 v1(29.5,23) ; R5_LS1.1 30.75,39.25 33.132,36.868 R8_LS1.1@36.518,36.868 ; IC8_DRV1.4 34.7,14.595 35.404,13.891 35.404,13.596 v1(35.5,13.5) ; R8_LS1.1 36.5,35.5 37.5,34.5 C1_LS1.1 39.325,33.31 39.5,33.135 v1(39.5,33) ; C5_DRV1.1 38.5,21.1 v1(38.5,23) ; 39.5,3.5 D4_DRV1.1 ; v1(40.5,13.5) 40.596,13.596 40.596,13.841 41.35,14.595 IC4_DRV1.4 ; v1(41,5.5) 41.025,5.525 42.09,5.525 IC7_DRV1.2 ; IC1_LS1.4 v1(47.595,40.405) 48,40 v1(48,32.9) 46.65,31.55 R3_LS1.1 R3_LS1.1@46.463,31.313 ; C3_DRV1.1 46.25,21.35 v1(46.25,23) ; v1(48.5,13.5) 48.5,13.635 48.793,13.928 48.793,14.456 48.931,14.595 IC2_DRV1.4 ; C2_DRV1.1 53.5,21.1 v1(53.5,23) ; IC9_DRV1.2 55.05,4.95 56.45,4.95 v1(56.5,5) ; D3_DRV1.1 56,7.07 56,8 v1(56.5,8.5) ; v1(56.5,13.5) 56.5,13.632 56.775,13.907 IC6_DRV1.4 ; C4_DRV1.1 61,21.1 v1(61,23)
  Bottom Layer w0.3: v1(9.5,5.5) 9.635,5.5 10.135,5 v1(25,5) v1(25,8.5) 25,10 29.5,14.5 v1(29.5,23) v1(22,23) ; v1(14.5,23) v1(7,23) 3.25,19.25 3.25,14.25 v1(4,13.5) v1(9,13.5) 10.75,15.25 15.678,15.25 v1(17.146,13.782) 17.146,13.917 17.643,14.413 17.643,15.144 18.689,16.191 22.309,16.191 v1(25,13.5) ; R5_LS2.1 26.25,48.25 30.75,43.75 R5_LS1.1 ; v1(38.5,23) 34.75,19.25 34.75,14.25 v1(35.5,13.5) v1(40.5,13.5) 42.25,15.25 47.25,15.25 47.827,14.673 47.827,14.173 v1(48.5,13.5) 48.5,13.629 49.143,14.272 49.143,15.144 50.189,16.191 53.809,16.191 v1(56.5,13.5) ; v1(41,5.5) 41.135,5.5 41.635,5 v1(56.5,5) v1(56.5,8.5) 56.5,10 61,14.5 v1(61,23) v1(53.5,23) v1(46.25,23) 46.25,31.15 v1(48,32.9)
  other v1: 2.5,1 5,1 7.5,1 10,1 12.5,1 15,1 17.5,1 20,1 22.5,1 25,1 34,1 36.5,1 39,1 41.5,1 44,1 46.5,1 49,1 51.5,1 54,1 56.5,1 26.5,3 58,3 2.5,3.5 7.5,3.5 39,3.5 2.5,6 7.5,6 39,6 26.5,8 58,8 2.5,8.5 34,8.5 26.5,10.5 58,10.5 2.5,11 34,11 26.5,13 58,13 2.5,13.5 34,13.5 26.5,15.5 58,15.5 3,25.5 4.5,25.5 6,25.5 7.5,25.5 9,25.5 10.5,25.5 15.5,39
REV_DRV1: IC1_LS1.7 IC4_DRV1.2 IC6_DRV1.2 R7_LS1.1 | length 50.3
  Top Layer w0.3: IC1_LS1.7 42.135,37.865 v1(43.5,36.5) 43.65,36.35 R7_LS1.1 ; IC4_DRV1.2 42.281,17.135 42.916,16.5 v1(43,16.5) ; IC6_DRV1.2@57.275,17.135 57.781,17.135 58.051,17.404 58.404,17.404 v1(58.5,17.5)
  Bottom Layer w0.3: v1(43,16.5) 47.318,16.5 47.568,16.75 51.5,16.75 ; v1(43.5,36.5) 45.75,34.25 45.75,33.189 45.5,32.939 45.5,22.439 45.5,19.5 46,19 50.061,19 51.5,17.561 51.5,16.75 ; v1(58.5,17.5) 52.5,17.5 51.75,16.75 51.5,16.75
REV_DRV2: IC1_LS2.7 IC4_DRV2.2 IC6_DRV2.2 R7_LS2.1 | length 44.8
  Top Layer w0.3: IC4_DRV2.2 10.781,17.135 11.416,16.5 v1(11.5,16.5) ; R7_LS2.1 21.35,35.35 v1(22.108,36.107) 22.865,36.865 IC1_LS2.7 ; IC6_DRV2.2@25.775,17.135 26.281,17.135 26.551,17.404
  Bottom Layer w0.3: v1(11.5,16.5) 15.818,16.5 16.068,16.75 20,16.75 ; v1(22.108,36.107) 22.108,34.547 19.5,31.939 19.5,18.5 20,18 20,16.75 ; v1(27,17.5) 21,17.5 20.25,16.75 20,16.75
VHSET_LS1: IC1_LS1.3 R2_LS1.1 R3_LS1.2 | length 11.7
  Top Layer w0.3: R2_LS1.1 R3_LS1.2 45.35,32.35 47.5,34.5 47.5,38.5 46.922,39.078 45.757,39.078 IC1_LS1.3
VHSET_LS2: IC1_LS2.3 R2_LS2.1 R3_LS2.2 | length 11.1
  Top Layer w0.3: R2_LS2.1 R3_LS2.2 17.35,33.65 18.922,32.078 23.902,32.078 24.078,32.253 24.078,33.243 IC1_LS2.3
VLSET_LS1: IC1_LS1.6 R6_LS1.1 R8_LS1.2 | length 4.2
  Top Layer w0.3: R8_LS1.2 R6_LS1.1 38.05,38.15 39.035,39.135 IC1_LS1.6
VLSET_LS2: IC1_LS2.6 R6_LS2.1 R8_LS2.2 | length 4.2
  Top Layer w0.3: R8_LS2.2 R6_LS2.1 23.15,40.95 24.135,39.965 IC1_LS2.6
XSENSE_LS1: IC1_LS1.2 IC1_LS1.5 R4_LS1.1 R5_LS1.2 | length 34.7
  Top Layer w0.3: R5_LS1.2 33.325,39.5 34.23,40.405 41.46,40.405 44,37.865 IC1_LS1.2
  Bottom Layer w0.3: R5_LS1.2 35,39.5 37.5,42 37.5,52.5 35.5,54.5 R4_LS1.1
XSENSE_LS2: IC1_LS2.2 IC1_LS2.5 R4_LS2.1 R5_LS2.2 | length 29.9
  Top Layer w0.3: IC1_LS2.2 22.865,35 25.405,37.54 IC1_LS2.5 25.405,42 ; R5_LS2.2 25.442,44.808 ; 25.405,44.77 25.405,42 ; R4_LS2.1 39.226,45.476 39.226,44.726 36.5,42 25.405,42
pads on no net: IC2_DRV1.6 IC2_DRV1.7 IC2_DRV1.8 IC2_DRV2.6 IC2_DRV2.7 IC2_DRV2.8 IC4_DRV1.6 IC4_DRV1.7 IC4_DRV1.8 IC4_DRV2.6 IC4_DRV2.7 IC4_DRV2.8 IC6_DRV1.6 IC6_DRV1.7 IC6_DRV1.8 IC6_DRV2.6 IC6_DRV2.7 IC6_DRV2.8 IC8_DRV1.6 IC8_DRV1.7 IC8_DRV1.8 IC8_DRV2.6 IC8_DRV2.7 IC8_DRV2.8

## Polygon pours and split planes (outlines as drawn)
3V3 on Top Layer "NONET_L-01_P-001" (solid, remove dead copper, pour order 8): 0,35 15.5,35 15.5,31.5 17,30 64,30 64,17.5 0,17.5
GND on Top Layer "NONET_L-01_P-001" (solid, remove dead copper, pour order 7): 13,29.5 0,29.5 0,0 64,0 64,24 59.5,24 59.5,19 9.5,19 9.5,22.5 13,26
DA_DRV1 on Top Layer "NONET_L-01_P-001" (solid, remove dead copper, pour order 0): 49,2 54,2 54,5.5 55,6.5 55,10 54,11 51,11 50.5,10.5 50.5,9.5 50,9 49.5,9 49,8.5 49,8
DB_DRV1 on Top Layer "NONET_L-01_P-001" (solid, remove dead copper, pour order 3): 48,2 48,11 47,11 46.5,10.5 46.5,9.5 46,9 45,9 44.5,9.5 44.5,10 44,10.5 43,10.5 42.5,10 42.5,8.5 43,8 43,2
GND on Top Layer "NONET_L-01_P-001" (solid, remove dead copper, pour order 4): 33,16.5 37.5,16.5 38.5,15.5 38.5,14 39,13.5 39,8 40.5,6.5 43,6.5 43,2 54,2 54,5.5 55,6.5 55,12.602 55.68,13.282 55.68,16.18 56,16.5 58,16.5 58.5,16 58.5,1.5 57.5,0.5 33,0.5 33,9
3V3 on Top Layer "NONET_L-01_P-001" (solid, remove dead copper, pour order 5): 55,11 55,12 52,15 52,22.5 51.5,23 48,23 47.5,22.5 47.5,20 47,19.5 45,19.5 44.5,20 44.5,22.5 44,23 41.5,23 41,22.5 41,18 41.5,17.5 43,17.5 43.5,17 43.5,14 42,12.5 42,11.5 42.5,11 48.5,11
3V3 on Top Layer "NONET_L-01_P-001" (solid, remove dead copper, pour order 5): 23.5,11 23.5,12 20.5,15 20.5,22.5 20,23 16.5,23 16,22.5 16,20 15.5,19.5 13.5,19.5 13,20 13,22.5 12.5,23 10,23 9.5,22.5 9.5,18 10,17.5 11.5,17.5 12,17 12,14 10.5,12.5 10.5,11.5 11,11 17,11
GND on Top Layer "NONET_L-01_P-001" (solid, remove dead copper, pour order 4): 1.5,16.5 6,16.5 7,15.5 7,14 7.5,13.5 7.5,8 9,6.5 11.5,6.5 11.5,2 22.5,2 22.5,5.5 23.5,6.5 23.5,12.602 24.18,13.282 24.18,16.18 24.5,16.5 26.5,16.5 27,16 27,1.5 26,0.5 1.5,0.5 1.5,9
DB_DRV2 on Top Layer "NONET_L-01_P-001" (solid, remove dead copper, pour order 3): 16.5,2 16.5,11 15.5,11 15,10.5 15,9.5 14.5,9 13.5,9 13,9.5 13,10 12.5,10.5 11.5,10.5 11,10 11,8.5 11.5,8 11.5,2
DA_DRV2 on Top Layer "NONET_L-01_P-001" (solid, remove dead copper, pour order 0): 17.5,2 22.5,2 22.5,5.5 23.5,6.5 23.5,10 22.5,11 19.5,11 19,10.5 19,9.5 18.5,9 18,9 17.5,8.5 17.5,8
GND on Bottom Layer "NONET_L-01_P-001" (solid, remove dead copper, pour order 9): 0,0 0,36.5 24.5,61 39.5,61 64,36.5 64,0
GND on Bottom Layer "NONET_L-01_P-001" (solid, remove dead copper, pour order 6): 63,0.5 63,24 33,24 33,0.5 41.5,0.5
GND on Bottom Layer "NONET_L-01_P-001" (solid, remove dead copper, pour order 6): 31.5,0.5 31.5,24 1.5,24 1.5,0.5 10,0.5

## Keep-outs
Keep-Out Layer:
  the board outline again, w0.2

## Silkscreen, mask and mechanical layers (free items; w line width, h text height)
Top Overlay:
  text "VCC GND" at 0,37 h3.5 r270
  text "E" at 52.273,26.37 h10
  text "O" at 2.888,2.735 h10
  text "HORIZ" at 5.563,0 h3
  text "A" at 13.987,0 h3
  text "B" at 18.176,0 h3
  text "A" at 45.487,0 h3
  text "B" at 49.676,0 h3
  text "VERT" at 53.198,0 h3
Bottom Overlay:
  text "track" at 33,24.967 h5
  text "solar" at 45.5,24.967 h5
  text "Altium Demo Project" at 45.5,21.282 h3
  text "SOLTRKV1R0" at 45.5,15.5 h3
  text "Mark Harris" at 15.25,11.75 h3 r270
  text "February 2022" at 45.5,11.75 h3